# Altium PCB PCB1.PcbDoc
Units mm, origin at the board's own origin, x right, y up, seen from the top; angles counter-clockwise.
Board outline 100 x 70 mm, 4 copper layers (Top Layer, Internal Plane 1, Internal Plane 2, Bottom Layer), stack 0.462 mm thick; 44 components, 53 nets, 204 pads, 0 vias.
Unrouted connection lines stored in the file: 2.
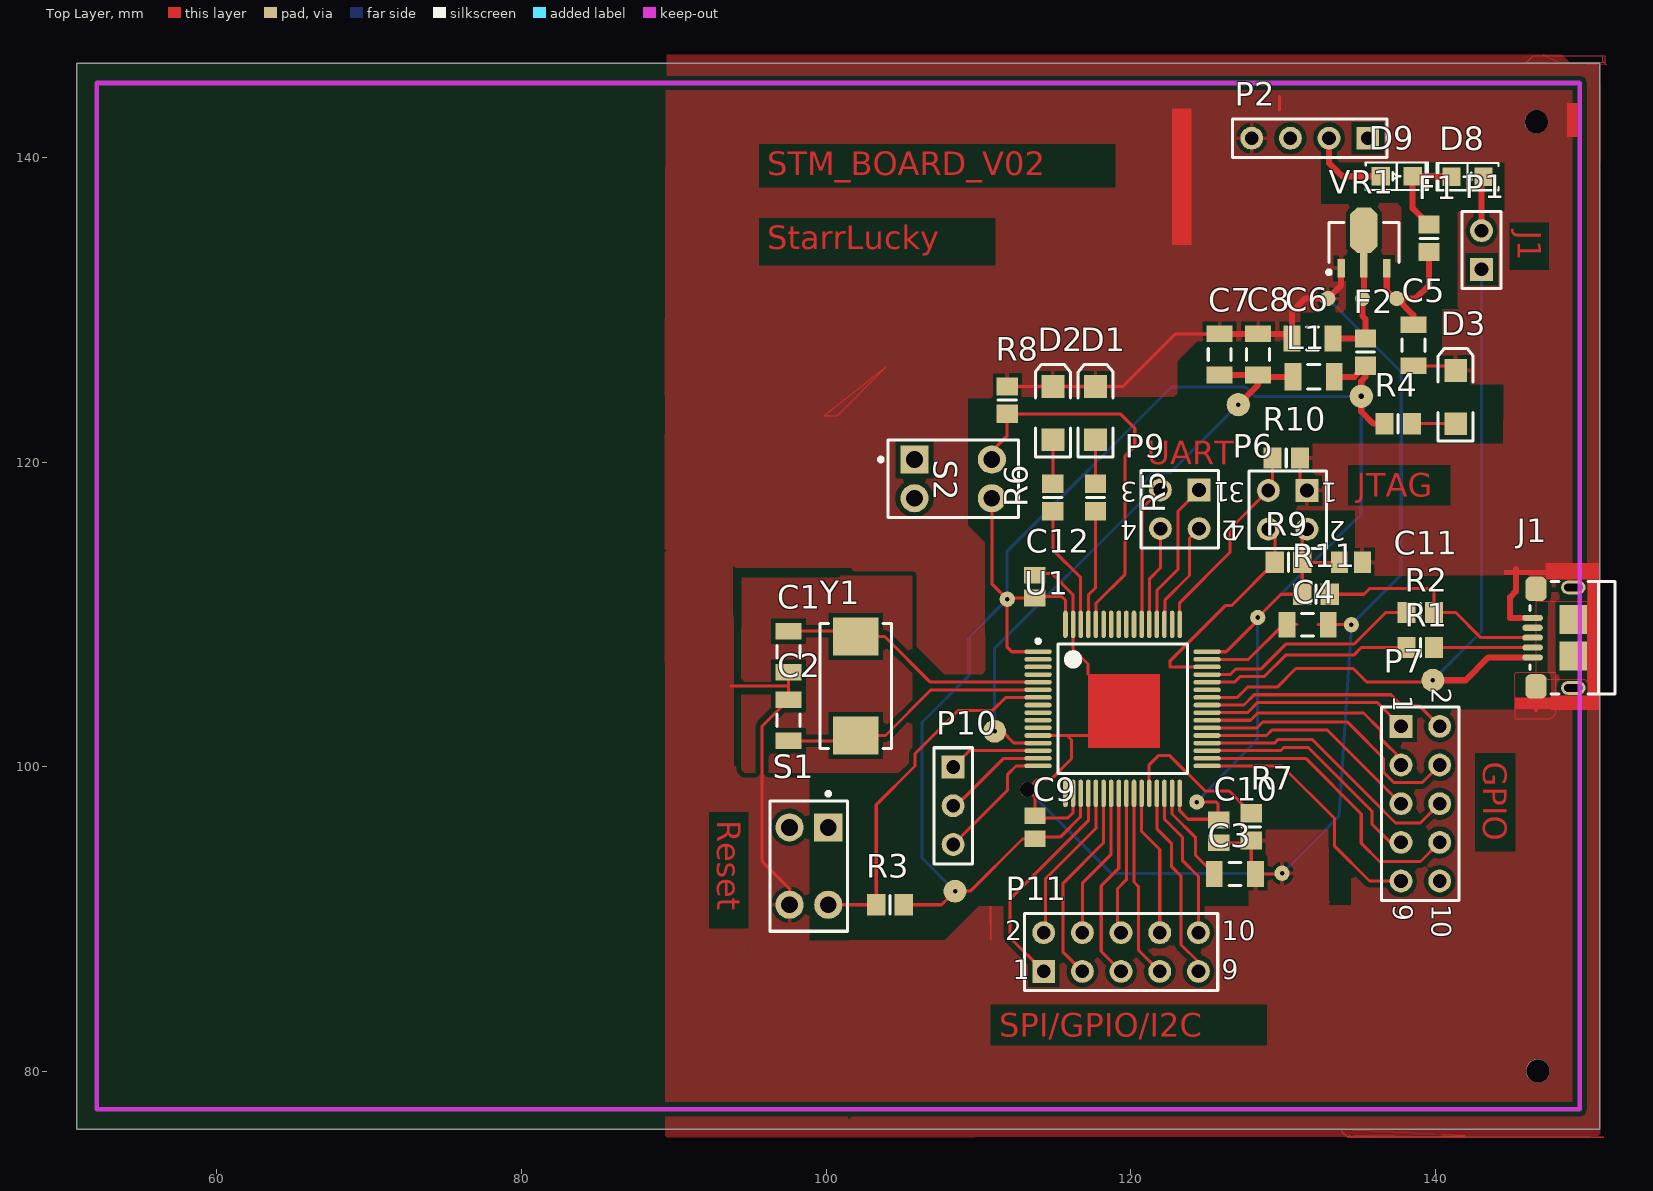
[diagram p0: Top Layer view]
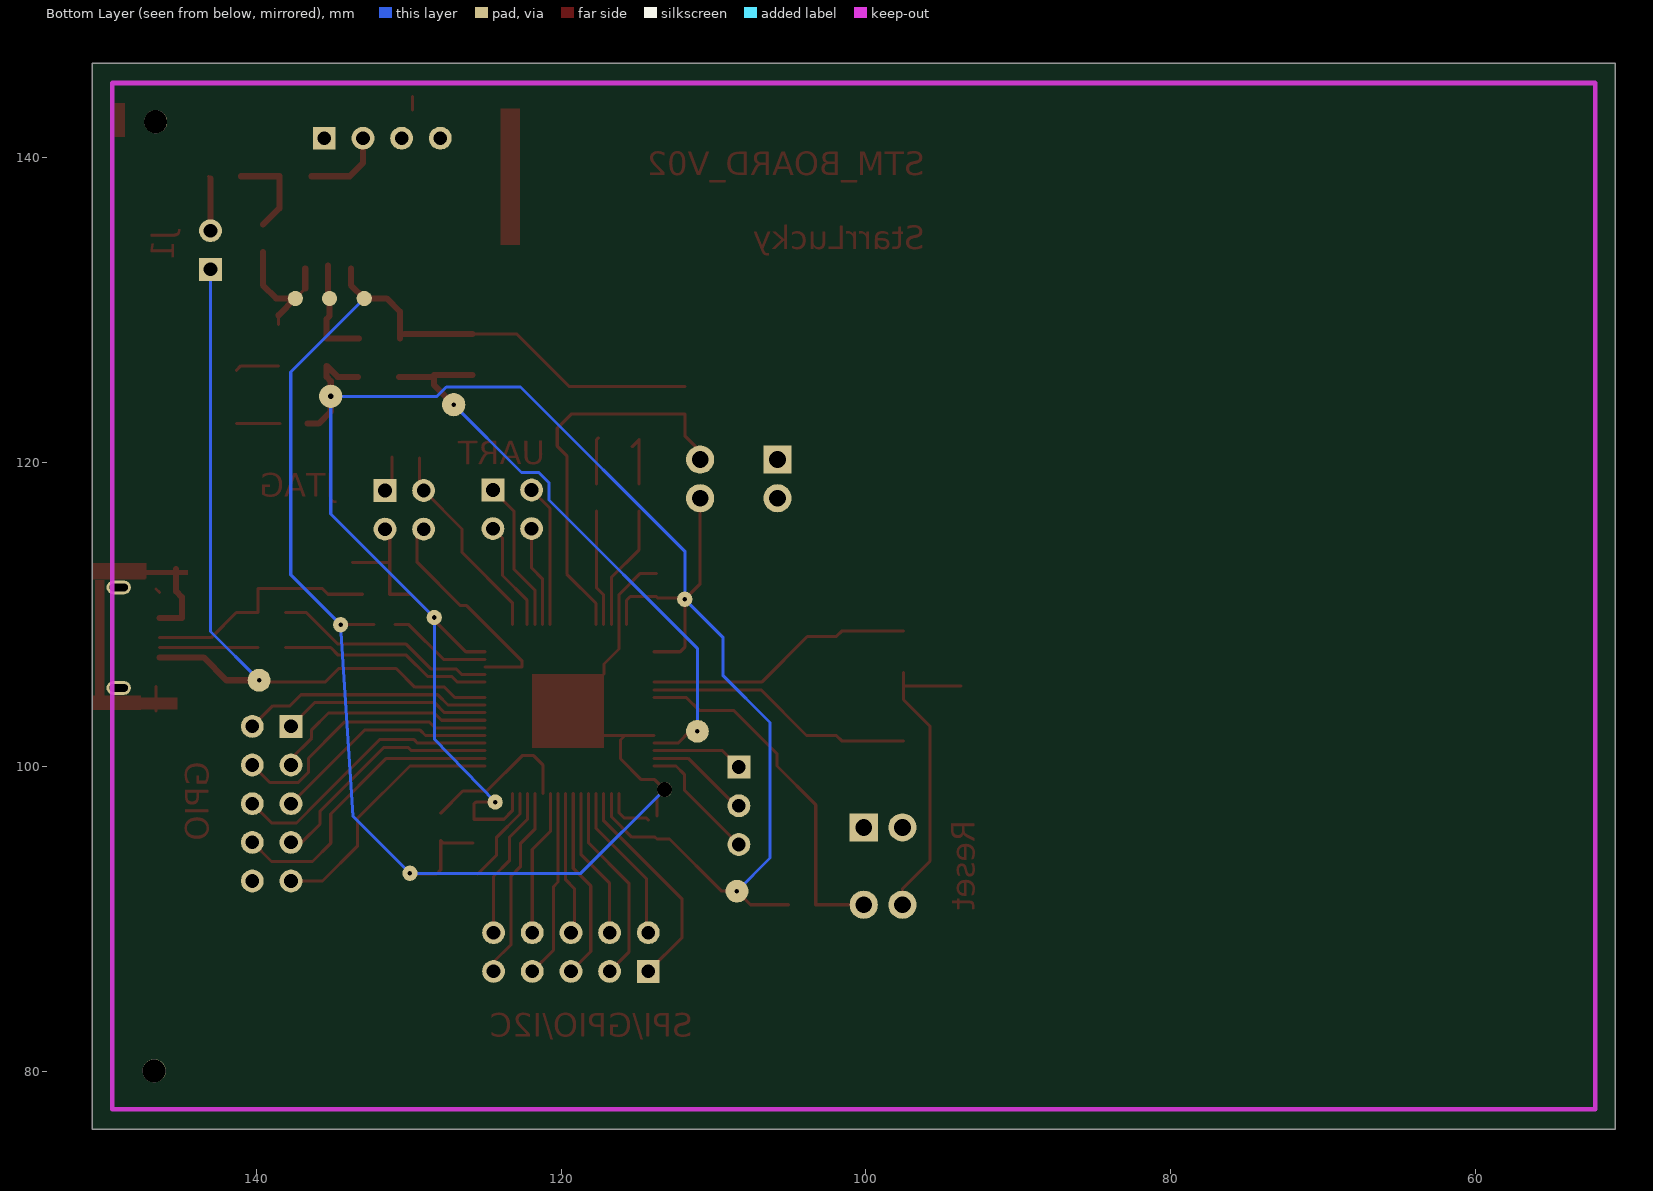
[diagram p1: Bottom Layer view, seen from below]
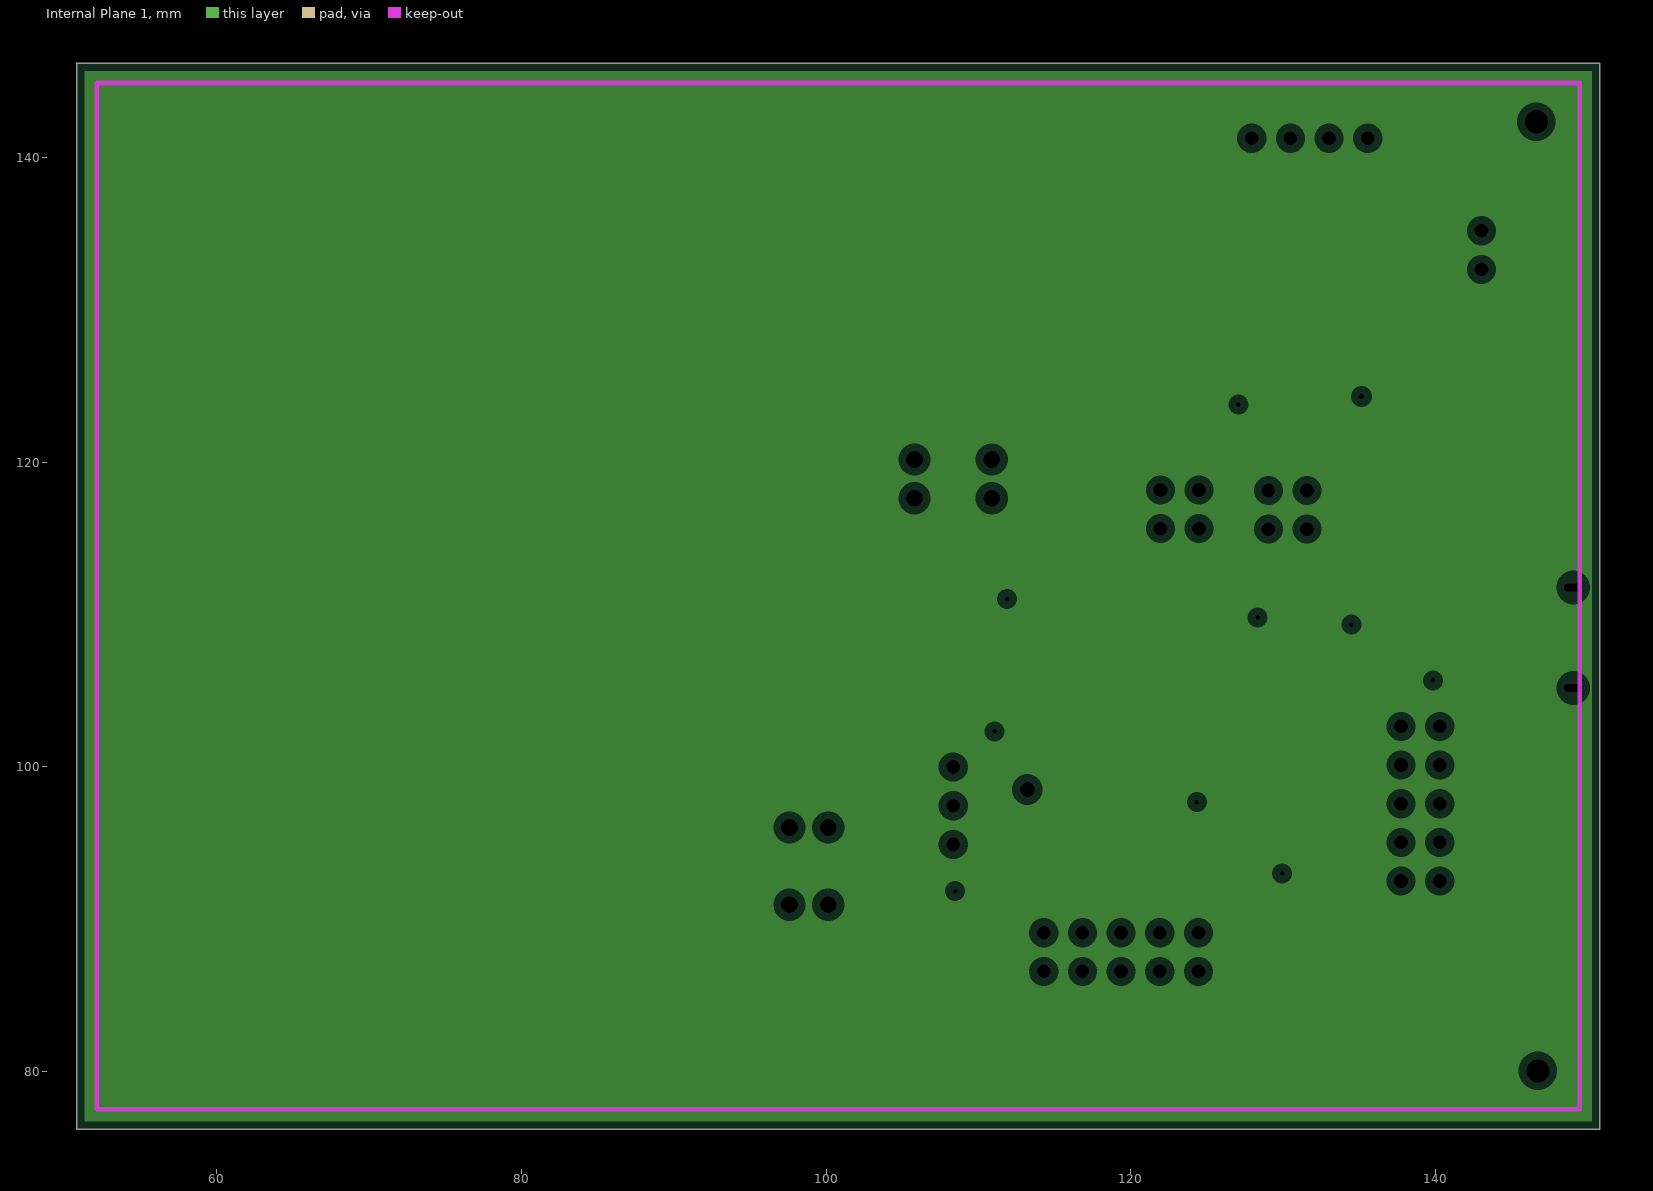
[diagram p2: Internal Plane 1, clearances drawn from the general rule]
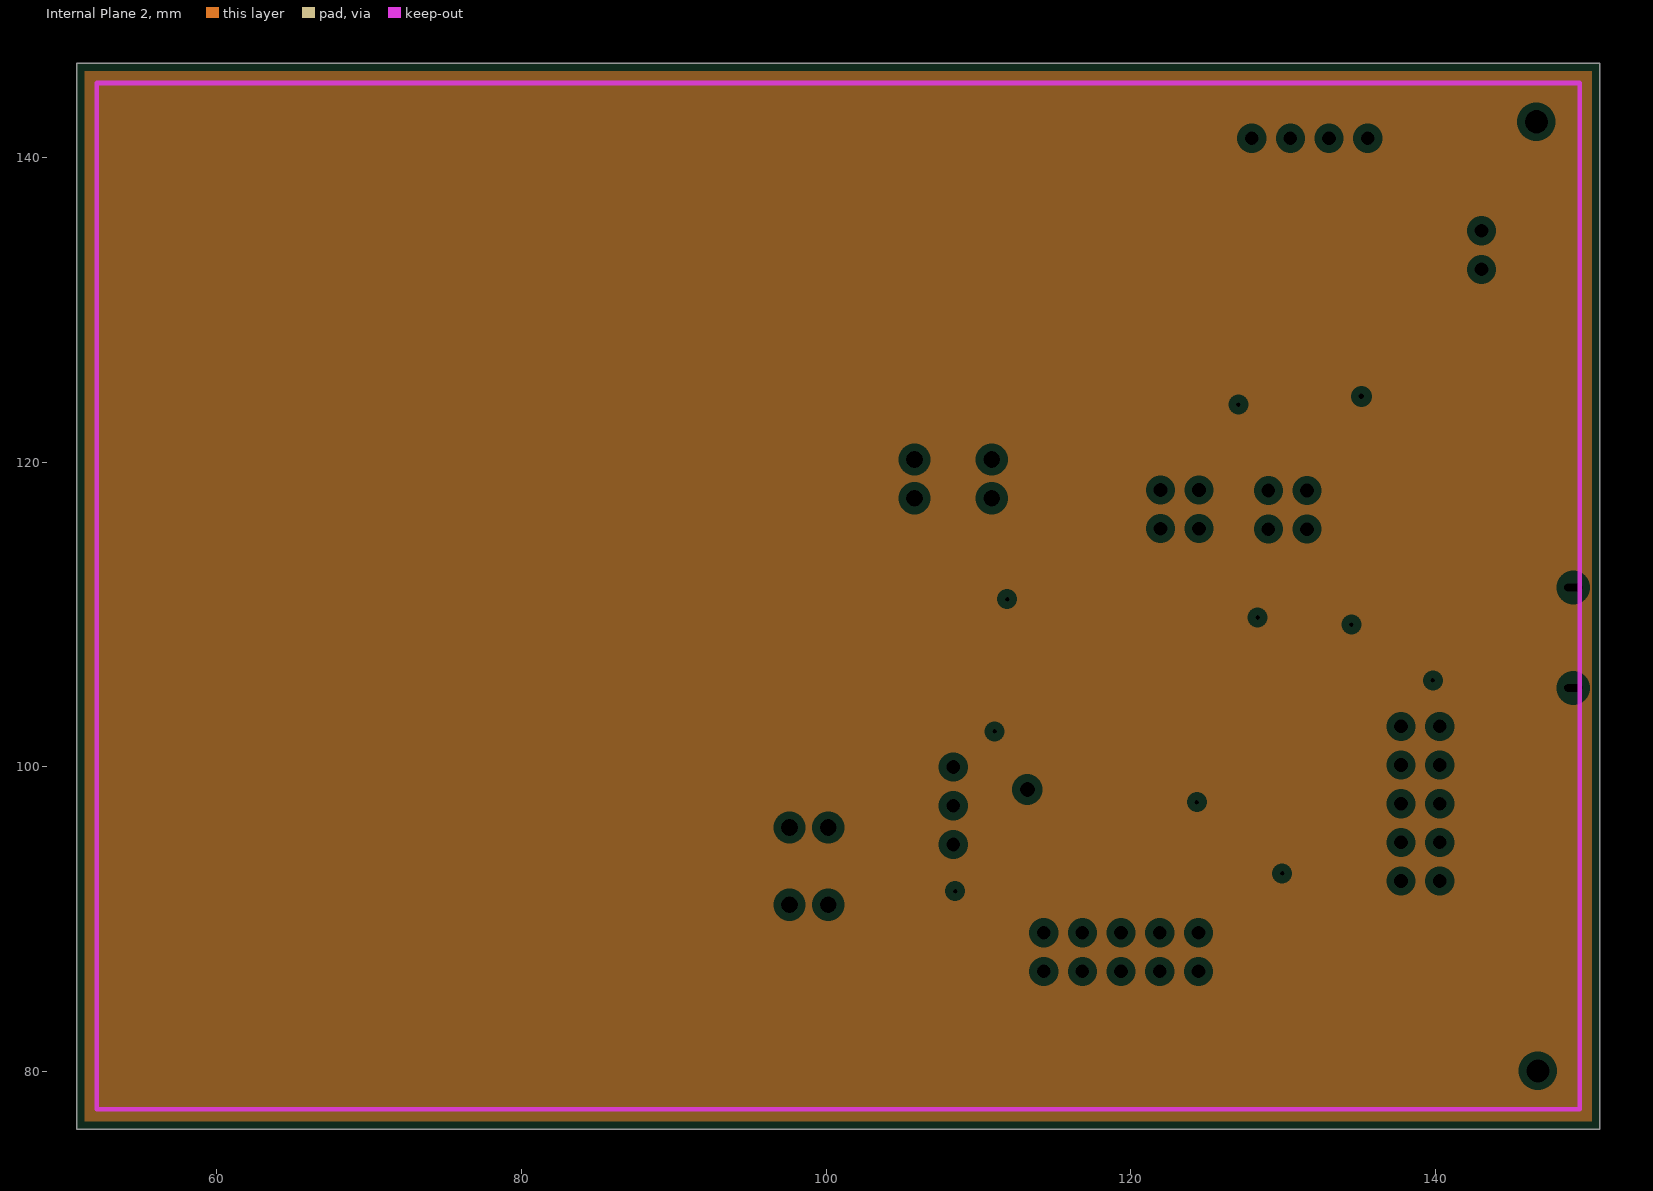
[diagram p3: Internal Plane 2, clearances drawn from the general rule]

## Layer stack, top to bottom
Top Solder: solder mask 0.0102, Solder Resist, Dk 3.5
Top Layer: signal copper 0.0356
Internal Plane 1: plane copper 0.0356
Internal Plane 2: plane copper 0.0356
Dielectric 1: dielectric 0.32, FR-4, Dk 4.8
Bottom Layer: signal copper 0.0356
Bottom Solder: solder mask 0.0102, Solder Resist, Dk 3.5

## Board outline
50.8,76.2 150.8,76.2 150.8,146.2 50.8,146.2

## Design rules (kind name [scope] priority, off if disabled: settings)
Clearance [All] p1: gap=0.3 ignorepadtopadclearanceinfootprint=FALSE
PlaneClearance [All] p1: clearance=0.508
PlaneConnect [All] p1: planeconnectstyle=Relief reliefexpansion=0.508 reliefentries=4 reliefconductorwidth=0.254 reliefairgap=0.254
PolygonConnect [All] p1: connectstyle=Relief reliefconductorwidth=0.254 reliefentries=4 polygonreliefangle="90 Angle" airgapwidth=0.254
RoutingVias [All] p1: holewidth=0.6 width=1 viastyle="Through Hole" minholewidth=0.711 minwidth=1.27 maxholewidth=0.711 maxwidth=1.27
SolderMaskExpansion [All] p1: expansion=0.102
Width [All] p1: maxlimit=0.2 minlimit=0.2 preferedwidth=0.2
28 further rules are at their usual default settings.

## Components (designator, comment, footprint, x,y, rotation, side; value= is the part's Value field where it differs from the comment)
C1 "Cap Semi" C1206 97.536,107.55 r270 top value=18pF
C2 "Cap Semi" C1206 97.536,103.05 r90 top value=18pF
C3 "Cap Semi" C1206 126.85,92.95 r0 top value=0.2uF
C4 "Cap Semi" C1206 131.625,109.325 r0 top value=0.2uF
C5 "" C1206 138.575,127.675 r90 top value=10uF
C6 "Cap Semi" C1206 131.95,128.125 r0 top value=10uF
C7 "Cap Semi" C1206 125.85,127.075 r270 top value=10uF
C8 "Cap Semi" C1206 128.375,127.075 r270 top value=1uF
C9 "Cap Semi" C0805 113.725,96.025 r90 top value=0.1uF
C10 "Cap Semi" C0805 125.8,95.75 r270 top value=0.1uF
C11 "Cap Semi" C0805 134.475,113.425 r0 top value=0.1uF
C12 "Cap Semi" C0805 113.7,111.825 r90 top value=0.1uF
D1 "LED2" 3.2X1.6X1.1 117.7,123.225 r90 top
D2 "LED3" 3.2X1.6X1.1 114.895,123.225 r90 top
D3 "PWR" 3.2X1.6X1.1 141.35,124.275 r90 top
D8 "Diode 1N4002" "LED 0805/2012" 142.125,138.75 r180 top
D9 "Diode 1N4002" "LED 0805/2012" 137.475,138.775 r0 top
F1 "Res3" 6-0805_N 139.6,134.7 r90 top value=0
F2 "Res3" 6-0805_N 135.425,127.225 r90 top value=0
J1 "USB Micro" "FCI USB 10118193-0001LF" 149.025,108.475 r270 top
L1 "Inductor" INDC3216 132.025,125.6 r180 top value=10mH
P1 "Header 2" HDR1X2 143.05,132.66 r90 top
P2 "PWR" HDR1X4 135.575,141.275 r180 top
P6 "SWD" HDR2X2 131.59,118.14 r180 top
P7 "GPIO" HDR2X5 137.76,102.65 r270 top
P9 "UART" HDR2X2 124.5,118.175 r180 top
P10 "ADC" HDR1X3 108.35,99.975 r270 top
P11 "SPI_I2C_TIM_GPIO" HDR2X5 114.295,86.56 r0 top
R1 "Res3" 6-0805_N 139.025,107.825 r0 top value=22
R2 "Res3" 6-0805_N 139.025,110.125 r0 top value=22
R3 "Res3" 6-0805_N 104.2,90.935 r0 top value=10K
R4 "Res3" 6-0805_N 137.575,122.525 r180 top value=330
R5 "" 6-0805_N 117.7,117.675 r270 top value=330
R6 "Res3" 6-0805_N 114.895,117.675 r270 top value=330
R7 "Res3" 6-0805_N 127.925,96.05 r90 top value=10K
R8 "Res3" 6-0805_N 111.9,124.075 r270 top value=10K
R9 "Res3" 6-0805_N 130.375,113.425 r0 top value=10K
R10 "Res3" 6-0805_N 130.225,120.275 r180 top value=10K
R11 "Res3" 6-0805_N 132.175,111.325 r180 top value=1.5k
S1 "SW-DPST" DPST-4 98.875,93.475 r270 top
S2 "SW-DPST" DPST-4 108.35,118.9 r0 top
U1 "STM32F405RGT6" STM-LQFP64_N 119.475,103.8 r0 top
VR1 "Volt Reg 3.3V" SOT89L 135.325,134.425 r90 top
Y1 "Value" "NDK NX8045GB" 101.95,105.3 r90 top

## Footprints (in the part's own frame and the unit in brackets; to place one, negate y for a bottom-side part, rotate by r counter-clockwise, add the part's x,y. Pads: shape width x height; smd on the part's side, far side on the other; paste and mask are expansions set on the pad)
3.2X1.6X1.1 [mm] "SMT LED; 2 Flat Leads"
  rect 1.5x1.5 smd: 1(-1.75,0) 2(1.75,0)
  silkscreen extent -2.9,-1.15 3.2,1.15
6-0805_N [mm] "Chip Resistor, Body 2.0x1.2mm, IPC Medium Density"
  rect 1.2x1.4 smd: 1(-0.9,0) 2(0.9,0)
  silkscreen extent 0,-0.6 0,0.6, body extent -1.07,-0.7 1.07,0.7, height 0.7
C0805 [mm] "Chip Capacitor, Body 2.0x1.3mm, IPC High Density"
  rect 1.1x1.4 smd: 1(-0.75,0) 2(0.75,0)
  body extent -1.1,-0.72 1.1,0.72, height 1.4
C1206 [mm] "Chip Capacitor, Body 3.2x1.6mm, IPC High Density"
  rect 1.1x1.7 smd: 1(-1.35,0) 2(1.35,0)
  silkscreen extent -0.4,-0.75 0.4,0.75, body extent -1.7,-0.9 1.7,0.9, height 1.3
DPST-4 [mm] "Switch; 4 Leads"
  rect 1.85x1.85 hole 1.1: 1(-2.54,1.27)
  round 1.85 hole 1.1: 2(-2.54,-1.27) 3(2.54,-1.27) 4(2.54,1.27)
  silkscreen extent -4.88,-2.54 4.28,2.54
"FCI USB 10118193-0001LF" [mm] "USB 2.0 Type B Micro"
  oval 0.4x1.35 smd: 1(1.3,-2.625) 2(0.65,-2.625) 3(0,-2.625) 4(-0.65,-2.625) 5(-1.3,-2.625)
  oval 0.9x1.6 hole 0.5 slot 1.2 at 90 deg: S(-3.3,0.05) S(3.3,0.05)
  rrect50% 1.6x1.4 smd: S(-3.2,-2.4) S(3.2,-2.4)
  rect 1.9x1.8 smd: S(-1.2,0.05) S(1.2,0.05)
  silkscreen extent -3.7,-2.8 3.7,2.8, body extent -3.93,-2.9 3.93,2.76, height 2.78
HDR1X2 [mm] "Connector; Header; 2 Position"
  rect 1.5x1.5 hole 0.9: 1(0,0)
  round 1.5 hole 0.9: 2(2.54,0)
  silkscreen extent -1.27,-1.27 3.81,1.27
HDR1X3 [mm] "Connector; Header; 3 Position"
  rect 1.5x1.5 hole 0.9: 1(0,0)
  round 1.5 hole 0.9: 2(2.54,0) 3(5.08,0)
  silkscreen extent -1.27,-1.27 6.35,1.27
HDR1X4 [mm] "Connector; Header; 4 Position"
  rect 1.5x1.5 hole 0.9: 1(0,0)
  round 1.5 hole 0.9: 2(2.54,0) 3(5.08,0) 4(7.62,0)
  silkscreen extent -1.27,-1.27 8.89,1.27
HDR2X2 [mm] "Connector; Header; 2x2 Position"
  rect 1.5x1.5 hole 0.9: 1(0,0)
  round 1.5 hole 0.9: 2(0,2.54) 3(2.54,0) 4(2.54,2.54)
  silkscreen extent -1.27,-1.27 3.81,3.81
HDR2X5 [mm] "Connector; Header; 5x2 Position"
  rect 1.5x1.5 hole 0.9: 1(0,0)
  round 1.5 hole 0.9: 2(0,2.54) 3(2.54,0) 4(2.54,2.54) 5(5.08,0) 6(5.08,2.54) 7(7.62,0) 8(7.62,2.54) 9(10.16,0) 10(10.16,2.54)
  silkscreen extent -1.27,-1.27 11.43,3.81
INDC3216 [mm] "Chip Inductor, Body 3.2x1.6mm, IPC High Density"
  rect 1.1x1.8 smd: 1(-1.35,0) 2(1.35,0)
  silkscreen extent -0.4,-0.8 0.4,0.8, body extent -1.7,-0.9 1.7,0.9, height 0.55
"LED 0805/2012" [mm] "Chip Diode, 2-Leads, Body 2.00x1.25mm, IPC Medium Density"
  rect 1.2x1.2 smd: 1(-1.05,0) 2(1.05,0)
  silkscreen extent -2.03,-0.9 2.03,0.9, body extent -1,-0.62 1,0.63, height 0.9
"NDK NX8045GB" [mm] "Crystal, 2-Leads, Body 4.50x8.00mm, Pitch 6.50mm, IPC Medium Density"
  rect 2.5x3 smd: 1(-3.25,0) 2(3.25,0)
  silkscreen extent -4.1,-2.35 4.1,2.35, body extent -4,-2.25 4,2.25, height 1.8
SOT89L [mm] "SOT89, 3-Leads, Body 4.5x2.4 mm, Pitch 1.5mm, Lead Span 4.1mm, IPC High Density"
  rect 1.2x0.5 smd: 1(-1.7,1.5) 3(-1.7,-1.5)
  rect 1.6x0.5 smd: 2(-1.5,0)
  oct 3x1.8 smd: 2(0.8,0)
  silkscreen extent -2.07,-2.3 1.3,2.42, body extent -1.3,-2.3 1.3,2.3, height 1.6
STM-LQFP64_N [mm] "Thin QFP, 64-Leads, Body 10x10mm, Pitch 0.5mm, IPC Medium Density"
  oval 1.8x0.3 smd: 1(-5.55,3.75) 2(-5.55,3.25) 3(-5.55,2.75) 4(-5.55,2.25) 5(-5.55,1.75) 6(-5.55,1.25) 7(-5.55,0.75) 8(-5.55,0.25) 9(-5.55,-0.25) 10(-5.55,-0.75) 11(-5.55,-1.25) 12(-5.55,-1.75) 13(-5.55,-2.25) 14(-5.55,-2.75) 15(-5.55,-3.25) 16(-5.55,-3.75) 33(5.55,-3.75) 34(5.55,-3.25) 35(5.55,-2.75) 36(5.55,-2.25) 37(5.55,-1.75) 38(5.55,-1.25) 39(5.55,-0.75) 40(5.55,-0.25) 41(5.55,0.25) 42(5.55,0.75) 43(5.55,1.25) 44(5.55,1.75) 45(5.55,2.25) 46(5.55,2.75) 47(5.55,3.25) 48(5.55,3.75)
  oval 0.3x1.8 smd: 17(-3.75,-5.55) 18(-3.25,-5.55) 19(-2.75,-5.55) 20(-2.25,-5.55) 21(-1.75,-5.55) 22(-1.25,-5.55) 23(-0.75,-5.55) 24(-0.25,-5.55) 25(0.25,-5.55) 26(0.75,-5.55) 27(1.25,-5.55) 28(1.75,-5.55) 29(2.25,-5.55) 30(2.75,-5.55) 31(3.25,-5.55) 32(3.75,-5.55) 49(3.75,5.55) 50(3.25,5.55) 51(2.75,5.55) 52(2.25,5.55) 53(1.75,5.55) 54(1.25,5.55) 55(0.75,5.55) 56(0.25,5.55) 57(-0.25,5.55) 58(-0.75,5.55) 59(-1.25,5.55) 60(-1.75,5.55) 61(-2.25,5.55) 62(-2.75,5.55) 63(-3.25,5.55) 64(-3.75,5.55)
  silkscreen extent -5.67,-4.25 4.25,4.57, body extent -5,-5 5,5, height 1.6

## Part data
C1 C2 C3 C4 C6 C7 C8 C9 C10 C11 C12: "Capacitor (Semiconductor SIM Model)", LatestRevisionDate=29-May-2009, LatestRevisionNote="IPC-7351 Footprint Added.", PackageDescription="Chip Capacitor", PackageReference=C1206, Published=8-Jun-2000, Publisher="Altium Limited"
C5: library part "Cap Semi", "Capacitor (Semiconductor SIM Model)", LatestRevisionDate=29-May-2009, LatestRevisionNote="IPC-7351 Footprint Added.", PackageDescription="Chip Capacitor", PackageReference=C1206, Published=8-Jun-2000, Publisher="Altium Limited"
D1: "Typical RED, GREEN, YELLOW, AMBER GaAs LED", LatestRevisionDate=17-Jul-2002, LatestRevisionNote="Re-released for DXP Platform.", PackageDescription="SM LED; 2 Flat Leads", PackageReference=3.2X1.6X1.1, PackageVersion=Feb-2002, Published=8-Jun-2000, Publisher="Altium Limited"
D2 D3: library part LED2, "Typical RED, GREEN, YELLOW, AMBER GaAs LED", LatestRevisionDate=17-Jul-2002, LatestRevisionNote="Re-released for DXP Platform.", PackageDescription="SM LED; 2 Flat Leads", PackageReference=3.2X1.6X1.1, PackageVersion=Feb-2002, Published=8-Jun-2000, Publisher="Altium Limited"
D8 D9: "1 Amp General Purpose Rectifier", Code_JEDEC=DO-204-AL, ComponentLink1Description="Manufacturer Link", ComponentLink1URL=http://www.fairchildsemi.com/, ComponentLink2Description=Datasheet, ComponentLink2URL=http://www.fairchildsemi.com/ds/1N%2F1N4001.pdf, DatasheetVersion=1998, LatestRevisionDate=17-Jul-2002, LatestRevisionNote="Re-released for DXP Platform.", PackageDescription="Diode, Axial; Body 5.2 x 2.7 mm (LxDia. max), Lead Dia. 0.86 mm (max)", PackageReference=DO-41, PackageVersion=Aug-1999, Published=8-Jun-2000, Publisher="Altium Limited"
F1 F2 R1 R2 R3 R4 R6 R7 R8 R9 R10 R11: "Resistor", LatestRevisionDate=29-May-2009, LatestRevisionNote="IPC-7351 Footprint Added.", PackageDescription="Chip Resistor", PackageReference=J1-0603, Published=8-Jun-2000, Publisher="Altium Limited"
J1: library part "USB 2.0 Type B Micro"
P1: "Header, 2-Pin", LatestRevisionDate=17-Jul-2002, LatestRevisionNote="Re-released for DXP Platform.", Publisher="Altium Limited"
P2: library part "Header 4", "Header, 4-Pin", LatestRevisionDate=17-Jul-2002, LatestRevisionNote="Re-released for DXP Platform.", Publisher="Altium Limited"
P6 P9: library part "Header 2X2", "Header, 2-Pin, Dual row", LatestRevisionDate=17-Jul-2002, LatestRevisionNote="Re-released for DXP Platform.", Publisher="Altium Limited"
P7 P11: library part "Header 5X2", "Header, 5-Pin, Dual row", LatestRevisionDate=17-Jul-2002, LatestRevisionNote="Re-released for DXP Platform.", Publisher="Altium Limited"
P10: library part "Header 3", "Header, 3-Pin", LatestRevisionDate=17-Jul-2002, LatestRevisionNote="Re-released for DXP Platform.", Publisher="Altium Limited"
R5: library part Res3, "Resistor", LatestRevisionDate=29-May-2009, LatestRevisionNote="IPC-7351 Footprint Added.", PackageDescription="Chip Resistor", PackageReference=J1-0603, Published=8-Jun-2000, Publisher="Altium Limited"
S1 S2: "Double-Pole, Single-Throw Switch", LatestRevisionDate=17-Jul-2002, LatestRevisionNote="Re-released for DXP Platform.", PackageDescription="Switch; 4 Leads", PackageReference=DPST-4, Published=24-Mar-1999, Publisher="Altium Limited"
U1: "ARM Cortex-M4 32-bit MCU+FPU, 210 DMIPS, 1024 kB Flash, 192 kB Internal RAM, 51 I/Os, 64-pin LQFP, -40 to 85 degC, Tray", I/Os (High Current)=51, Manufacturer=STMicroelectronics, Operating Frequency(F) (Processor speed) (MHz)=168, Supplier Part Number 1=497-11767-ND, Supply Voltage(Vcc) max (V)=3.6, Supply Voltage(Vcc) min (V)=1.8, ComponentLink1Description="Manufacturer URL", ComponentLink1URL=http://www.st.com/web/en/home.html, ComponentLink2Description=Datasheet, ComponentLink2URL=http://www.st.com/st-web-ui/static/active/en/resource/technical/document/datasheet/DM00037051.pdf, ComponentLink3Description="Package Specification", ComponentLink3URL=http://www.st.com/st-web-ui/static/active/en/resource/technical/document/datasheet/DM00037051.pdf, Core="ARM Cortex-M4", D/A Converter=2x12-bit, DatasheetVersion="Rev. 4", FLASH Size (Prog) (kB)=1024, Internal RAM Size (kB)=192, Mounting Technology="Surface Mount", PackageDescription="64-Pin Low Profile Quad Flat Package, 10 x 10 mm Body, 0.5 mm Pitch", PackageReference=LQFP64, PackageVersion="Rev. 4, 06/2013", Packing=Tray, PartNumber=STM32F405RGT6, Supplier 1=Digi-Key, Supplier 2=Farnell, Supplier 3=Newark, Supplier 4=Mouser, Supplier Part Number 2=2064363, Supplier Part Number 3=73T2329, Supplier Part Number 4=511-STM32F405RGT6
VR1: library part "Volt Reg", "Voltage Regulator", LatestRevisionDate=29-May-2009, LatestRevisionNote="IPC-7351 Footprint Added.", PackageDescription="3-Pin Transistor Outline Package 2.54 mm Pitch, 15.1 mm Lead Span", PackageReference=D2PAK, Published=24-Mar-1999, Publisher="Altium Limited"
Y1: library part "Abracon Crystal ABLS", "SMT Crystal"
L1: Code_IEC=1005, Code_JEITA=0402, LatestRevisionDate=29-May-2009, LatestRevisionNote="IPC-7351 Footprint Added.", PackageDescription="Chip Inductor", PackageReference=0402-A, Published=8-Jun-2000, Publisher="Altium Limited"

## Free pads (board coordinates)
  round 1 hole 0.3: 3.3(128.35,109.8) 7(129.95,93) 15(111.9,111) 18(124.35,97.675) G(134.5,109.325)
  round 1.5 hole 0.3: 5V(139.85,105.675) 8(108.475,91.825) 9(111.075,102.325)
  round 1 all layers, no hole: 6(132.95,130.75) 11(137.475,130.75) 12(135.225,130.75)
  round 1 hole 1: 10(113.225,98.5)
  round 1.524 hole 0.3: 13(127.075,123.775)
  round 1.524 hole 0.362: 14(135.15,124.325)
  round 1.524 hole 1.524: 16(146.65,142.35) 17(146.75,80.025)

## Nets (pads, with @x,y where several pads share a name; then routed paths per layer and width w, separated by ;. In a path a pad name is that pad's centre, name@x,y a point inside that pad or via, vN(x,y) a via of type N, cw(c..) or ccw(c..) an arc to the next point about the centre after c; other vN are vias at no path point)
+3.3V: C9.1 C10.1 C11.1 C12.1 F2.1 L1.1 P6.2 pad.3.3 pad.8 pad.14 pad.15 pad.18 R3.2 R4.2 R9.2 R11.2 S2.3 U1.1 U1.19 U1.32 U1.48 U1.64 | length 146.4
  Top Layer w0.2: R3.2 107.585,90.935 pad.8 109.475,91.825 112.9,95.25 113.725,95.25 113.85,95.375 115.375,95.375 116.725,96.725 U1.19 ; S2.3 110.89,112.01 pad.15 111.9,107.85 112.2,107.55 U1.1 ; pad.15@112,110.9 112.175,111.075 C12.1 ; C12.1@113.75,111.175 115.475,111.175 115.725,110.925 U1.64 ; U1.32 123.225,97.1 123.775,96.55 125.75,96.55 125.75,97.55 125.625,97.675 pad.18 ; U1.48 126.275,107.55 128.35,109.625 pad.3.3 129.875,111.325 R11.2 R9.2 ; P6.2 131.275,115.285 R9.2 ; C11.1 R9.2
  Top Layer w0.4: L1.1 134.7,125.6 F2.1 135.425,125.6 135.15,125.325 pad.14 135.15,123.325 135.95,122.525 R4.2
  Bottom Layer w0.2: pad.8 106.3,94 106.3,102.9 109.4,106 109.4,108.5 pad.15 111.9,114.15 122.687,124.937 127.556,124.937 128.168,124.325 pad.14 135.15,116.6 pad.3.3 128.35,101.825 pad.18
+5V: D8.2 D9.2 F1.2 | length 6.2
  Top Layer w0.2: D8.2@141.05,138.775 D8.2
  Top Layer w0.4: F1.2 138.525,136.675 D9.2 D8.2@141.05,138.775
GND: C1.2 C2.2 C3.2 C4.2 C5.1 C6.1 C7.1 C8.1 C9.2 C10.2 C11.2 C12.2 D1.2 D2.2 D3.2 J1.5 J1.S P2.4 P6.1 pad.6 pad.7 pad.10 pad.17 pad.G R7.1 R8.1 R10.1 S1.3 U1.12 U1.18 U1.63 VR1.1 | length 153.5
  Top Layer w0.2: 93.775,105.3 97.536,105.3 ; C1.2 97.536,105.3 ; S1.3 97.605,91.995 95.8,93.8 95.8,102.664 C2.2 97.536,105.3 ; R8.1 D2.2 D1.2 119.5,124.975 122.95,128.425 C7.1 ; C9.2 113.725,98 pad.10 113.875,99.15 114.75,99.15 116.125,100.525 116.125,101.75 115.825,102.05 ; C12.2@113.75,112.675 114.85,112.675 116.225,111.3 U1.63 116.225,107.725 117.2,106.75 117.2,106.075 ; U1.12 115.825,102.05 ; C9.2@114.3,96.5 114.425,96.625 115.875,96.625 116.225,96.975 U1.18 ; 117.45,102.05 115.825,102.05 ; C10.2 127.775,95 R7.1 127.925,93.225 C3.2 129.9,92.95 pad.7 ; 129.775,143.129 129.775,144.025 ; C6.1@130.3,128.425 C6.1 ; R10.1@131.125,120.341 R10.1 131.125,118.605 P6.1 ; 132.325,109.325 pad.G ; C5.1 141.05,126.325 D3.2 ; J1.S@146.4,111.45 J1.S@146.625,111.675 ; 146.625,103.675 J1.S@146.625,105.275
  Top Layer w0.4: C7.1 C8.1 C6.1@130.3,128.425 ; C6.1 130.6,129.875 131.475,130.75 pad.6 133.825,131.625 VR1.1 ; 145.3,112.975 145.3,111.513 144.925,111.138 144.925,109.775 J1.5
  Bottom Layer w0.2: pad.10 118.725,93 pad.7 133.675,96.725 pad.G 137.775,112.6 137.775,125.925 pad.6
NetC1_1: C1.1 U1.5 Y1.2 | length 17.8
  Top Layer w0.2: C1.1 101.6,108.9 Y1.2 103.85,108.55 106.85,105.55 U1.5
NetC2_1: C2.1 U1.6 Y1.1 | length 17.8
  Top Layer w0.2: C2.1 101.6,101.7 Y1.1 103.9,102.05 106.9,105.05 U1.6
NetC3_1: C3.1 U1.31 | length 6.4
  Top Layer w0.2: U1.31 122.725,96.893 124.275,95.343 124.275,94.175 C3.1
NetC4_1: C4.1 U1.47 | length 6.8
  Top Layer w0.2: U1.47 127.75,107.05 130.025,109.325 130.925,109.325
NetC5_2: C5.2 F1.1 pad.11 VR1.3 | length 9.1
  Top Layer w0.2: 136.825,131.4 pad.11 ; C5.2 138.575,129.65
  Top Layer w0.4: 136.825,131.4 VR1.3 ; 138.575,129.65 pad.11 138.725,130.75 139.6,131.625 F1.1
NetC6_2: C6.2 F2.2 pad.12 VR1.2 | length 7
  Top Layer w0.2: pad.12 pad.12@135.325,130.85
  Top Layer w0.4: C6.2 F2.2 135.425,129.4 135.225,129.6 pad.12 ; pad.12@135.325,130.85 VR1.2@135.325,132.925
NetC7_2: C7.2 C8.2 L1.2 pad.9 pad.13 U1.13 | length 39.3
  Top Layer w0.2: pad.9 111.575,102.325 112.35,101.55 U1.13 ; C8.2 C8.2@128.5,125.6
  Top Layer w0.4: C7.2 C8.2 128.375,125.075 pad.13 ; C8.2@128.5,125.6 L1.2
  Bottom Layer w0.2: pad.9 111.075,107.775 120.81,117.51 120.81,118.651 121.484,119.325 122.625,119.325 pad.13
NetD1_1: D1.1 R5.1 | length 3.1
  Top Layer w0.2: D1.1@117.575,121.6 D1.1 R5.1
NetD2_1: D2.1 R6.1 | length 3.5
  Top Layer w0.2: R6.1 D2.1 D2.1@115.35,121.02
NetD3_1: D3.1 R4.1 | length 2.9
  Top Layer w0.2: R4.1 D3.1
NetD8_1: D8.1 P1.2 | length 3.6
  Top Layer w0.2: D8.1@143.05,138.625 D8.1
  Top Layer w0.4: P1.2 D8.1@143.05,138.625
NetD9_1: D9.1 P2.2 | length 5.4
  Top Layer w0.4: P2.2 133.035,139.64 133.9,138.775 D9.1
NetJ1_2: J1.2 R1.2 | length 6.5
  Top Layer w0.2: R1.2 J1.2
NetJ1_3: J1.3 J1.4 R2.2 R11.1 | length 15.7
  Top Layer w0.2: R11.1 135.325,111.325 135.7,111.7 139.925,111.7 R2.2 141.35,110.125 143,108.475 J1.3
NetP6_3: P6.3 R10.2 U1.49 | length 13.5
  Top Layer w0.2: U1.49 123.225,110.775 126.525,114.075 126.525,115.615 P6.3 129.325,118.415 R10.2
NetP6_4: P6.4 R9.1 U1.46 | length 14.8
  Top Layer w0.2: U1.46 122.575,106.55 122.575,106.925 126.225,110.575 126.625,110.575 R9.1 129.475,115.175 P6.4
NetP7_1: P7.1 U1.40 | length 13.7
  Top Layer w0.2: U1.40 127.675,103.55 128.35,104.225 136.185,104.225 P7.1
NetP7_2: P7.2 U1.41 | length 16.4
  Top Layer w0.2: U1.41 127.45,104.05 128.125,104.725 137.1,104.725 137.825,104 138.95,104 P7.2
NetP7_3: P7.3 U1.39 | length 14.9
  Top Layer w0.2: U1.39 127.824,103.05 127.882,103.05 128.357,103.525 135.3,103.525 136.4,102.425 136.4,101.875 137.76,100.515 P7.3
NetP7_4: P7.4 U1.38 | length 18.1
  Top Layer w0.2: U1.38 128.3,102.55 128.7,102.95 134.225,102.95 135.575,101.6 135.575,101.588 136.61,100.553 136.61,99.634 137.284,98.96 139.15,98.96 P7.4
NetP7_5: P7.5 U1.37 | length 14.9
  Top Layer w0.2: U1.37 128.925,102.05 129.275,102.4 132.93,102.4 P7.5
NetP7_6: P7.6 U1.36 | length 18.2
  Top Layer w0.2: U1.36 129.45,101.55 129.675,101.775 131.95,101.775 136.61,97.115 136.61,97.094 137.404,96.3 139.03,96.3 P7.6
NetP7_7: P7.7 U1.35 | length 15.9
  Top Layer w0.2: U1.35 129.85,101.05 130.075,101.275 131.65,101.275 135.85,97.075 135.85,96.225 137.045,95.03 P7.7
NetP7_8: P7.8 U1.34 | length 19.7
  Top Layer w0.2: U1.34 131.5,100.55 135.15,96.9 135.15,94.975 136.35,93.775 139.045,93.775 P7.8
NetP7_9: P7.9 U1.33 | length 16.9
  Top Layer w0.2: U1.33 129.95,100.05 133.4,96.6 133.4,94.775 135.685,92.49 P7.9
NetP9_1: P9.1 U1.52 | length 10
  Top Layer w0.2: U1.52@121.75,109.325 121.75,111.6 123.11,112.96 123.11,116.785 P9.1
NetP9_2: P9.2 U1.51 | length 7.2
  Top Layer w0.2: U1.51@122.25,109.325 122.25,110.925 123.875,112.55 123.875,115.01 P9.2
NetP9_3: P9.3 U1.54 | length 9.4
  Top Layer w0.2: U1.54@120.75,109.325 120.75,116.965 P9.3
NetP9_4: P9.4 U1.53 | length 6.6
  Top Layer w0.2: U1.53@121.25,109.325 121.25,112.35 121.96,113.06 P9.4
NetP10_1: P10.1 U1.14 | length 6
  Top Layer w0.2: P10.1 109.425,101.05 U1.14
NetP10_2: P10.2 U1.15 | length 6.9
  Top Layer w0.2: P10.2 108.56,97.435 111.675,100.55 U1.15
NetP10_3: P10.3 U1.16 | length 8.3
  Top Layer w0.2: P10.3 111.925,98.47 111.925,99.5 112.475,100.05 U1.16
NetP11_1: P11.1 U1.20 | length 14.7
  Top Layer w0.2: P11.1 112.075,88.78 112.075,91.3 117.225,96.45 U1.20
NetP11_2: P11.2 U1.21 | length 10.6
  Top Layer w0.2: P11.2 114.4,89.205 114.4,92.625 117.725,95.95 U1.21
NetP11_3: P11.3 U1.22 | length 13.3
  Top Layer w0.2: P11.3 115.575,87.82 115.575,92.35 118.225,95 U1.22
NetP11_4: P11.4 U1.23 | length 9.9
  Top Layer w0.2: P11.4 116.85,89.115 116.85,92.375 118.725,94.25 U1.23
NetP11_5: P11.5 U1.24 | length 12.7
  Top Layer w0.2: U1.24 119.225,93.325 118.075,92.175 118.075,87.86 P11.5
NetP11_6: P11.6 U1.25 | length 9.5
  Top Layer w0.2: P11.6 119.15,89.325 119.15,92 119.725,92.575 U1.25
NetP11_7: P11.7 U1.26 | length 12.4
  Top Layer w0.2: U1.26 120.225,92.425 120.525,92.125 120.525,87.95 P11.7
NetP11_8: P11.8 U1.27 | length 9.6
  Top Layer w0.2: U1.27 120.725,95.75 121.915,94.56 P11.8
NetP11_9: P11.9 U1.29 | length 12.8
  Top Layer w0.2: U1.29 121.725,95.925 122.7,94.95 122.7,93.425 123.305,92.82 123.305,88.329 124.455,87.179 P11.9
NetP11_10: P11.10 U1.30 | length 10.1
  Top Layer w0.2: U1.30 122.225,96.55 123.425,95.35 123.425,93.825 124.455,92.795 P11.10
NetR1_1: R1.1 U1.44 | length 14
  Top Layer w0.2: U1.44 126.825,105.55 127.2,105.925 128.782,105.925 130.182,107.325 134.657,107.325 135.157,107.825 R1.1
NetR2_1: R2.1 U1.45 | length 14.8
  Top Layer w0.2: U1.45 126.55,106.05 126.925,106.425 128.575,106.425 130.2,108.05 134.675,108.05 136.75,110.125 R2.1
NetR3_1: R3.1 S1.4 U1.7 | length 23.7
  Top Layer w0.2: S1.4 R3.1 103.3,97.5 105.85,100.05 105.85,100.85 108.7,103.7 110.95,103.7 111.8,104.55 U1.7
NetR5_2: R5.2 U1.61 | length 7.6
  Top Layer w0.2: U1.61 117.225,111.275 117.7,111.75 R5.2
NetR6_2: R6.2 U1.62 | length 8.2
  Top Layer w0.2: R6.2 114.895,114.255 116.725,112.425 U1.62
NetR7_2: R7.2 U1.28 | length 10.4
  Top Layer w0.2: U1.28 121.225,100.125 121.825,100.725 122.575,100.725 124.9,98.4 126.475,98.4 R7.2
NetR8_2: R8.2 S2.4 U1.60 | length 26.1
  Top Layer w0.2: S2.4 110.89,120.715 111.9,121.725 R8.2 119.325,123.175 120.275,122.225 120.275,121.05 119.644,120.419 119.644,112.644 117.725,110.725 U1.60
VbusP: J1.1 P1.1 pad.5V U1.42 | length 51.5
  Top Layer w0.2: U1.42 127,104.55 127.675,105.225 129.625,105.225 130.85,106.45 134.625,106.45 135.525,105.55 139.725,105.55 pad.5V
  Top Layer w0.4: pad.5V 142,105.675 143.5,107.175 J1.1
  Bottom Layer w0.2: pad.5V 143.05,108.875 P1.1
pads on no net: P2.1 P2.3 P7.10 S1.1 S1.2 S2.1 S2.2 U1.2 U1.3 U1.4 U1.8 U1.9 U1.10 U1.11 U1.17 U1.43 U1.50 U1.55 U1.56 U1.57 U1.58 U1.59

## Polygon pours and split planes (outlines as drawn)
GND on Top Layer "GND_L01_P154" (solid, pour order 154): 147.075,146.75 147.15,146.675 151.125,146.675 151.125,146.25 151.15,146.225 148.075,146.225
GND on Top Layer "GND_L01_P152" (solid, pour order 152): 146,146.225 146.45,146.675 150.975,146.675 150.975,146.35 151.225,146.1
GND on Top Layer "GND_L01_P150" (solid, pour order 150): 133.875,76.175 133.875,76.025 134.25,75.65 134.35,75.75 141.95,75.75
GND on Top Layer "GND_L01_P148" (solid, pour order 148): 134.5,75.7 150.624,75.7 150.633,75.709 150.325,76.018 150.325,76.5
GND on Top Layer "GND_L01_P146" (solid, pour order 146): 134.5,76.4 150.75,76.4 150.825,76.475 150.85,76.45 150.85,75.7
GND on Top Layer "GND_L01_P144" (solid, pour order 144): 134.275,75.675 134.3,75.65 151.075,75.65
GND on Top Layer "GND_L01_P142" (solid, pour order 142): 89.474,144.413 89.525,144.464 89.525,146.75 148.3,146.75 150.775,144.275
GND on Top Layer "GND_L01_P140" (solid, pour order 140): 99.9,123.05 100.725,123.05 103.95,126.275
GND on Top Layer "GND_L01_P138" (solid, pour order 138): 100.475,123.025 101.85,124.4 108.625,124.4
GND on Top Layer "GND_L01_P136" (solid, pour order 136): 101.2,123.375 101.2,124.75 102.6,123.35 109.1,123.35 109.1,124.225 109.525,124.65
GND on Top Layer "GND_L01_P134" (solid, pour order 134): 109.275,115.875 109.3,115.9 109.3,124.15 101.375,124.15 101.175,124.35 101.05,124.225 101.05,115.825
GND on Top Layer "GND_L01_P132" (solid, pour order 132): 101.611,113.062 93.888,113.062 93.825,113.125 93.875,113.175 93.875,124.225 101.625,124.225
GND on Top Layer "GND_L01_P130" (solid, pour order 130): 89.474,144.413 111.1,144.413 111.1,124.475 110.825,124.2 89.425,124.2
GND on Top Layer "GND_L01_P128" (solid, pour order 128): 89.426,114.107 89.483,114.05 93.875,114.05 93.875,140.425 89.475,144.825
GND on Top Layer "GND_L01_P126" (solid, pour order 126): 89.426,114.107 93.483,110.05 93.875,110.05 93.875,114.05
GND on Top Layer "GND_L01_P122" (solid, pour order 122): 89.45,99.472 89.478,99.5 93.95,99.5 93.95,110.2 93.875,110.275 93.875,110.05 89.425,114.5
GND on Top Layer "GND_L01_P120" (solid, pour order 120): 93.55,86.875 95.25,88.575 101.9,88.575 101.9,88.525 103.425,87
GND on Top Layer "GND_L01_P118" (solid, pour order 118): 94.025,88.3 99.15,88.3 99.175,88.325 98.9,88.6 98.9,100.175 93.375,100.175 92.95,99.75
GND on Top Layer "GND_L01_P116" (solid, pour order 116): 89.45,88.25 89.45,93.825 89.525,93.9 95.25,88.175 99.225,88.175
GND on Top Layer "GND_L01_P114" (solid, pour order 114): 98.6,88.3 89.5,88.3 98.5,97.3 98.5,99.7 89.625,99.7 89.6,99.725 89.45,99.575 89.45,88.25
GND on Top Layer "GND_L01_P112" (solid, pour order 112): 89.45,75.775 89.575,75.65 101.475,75.65 101.475,88.45 101.325,88.6 100.975,88.25 89.45,88.25
GND on Top Layer "GND_L01_P106" (solid, pour order 106): 123.05,144.675 123.05,124.325 122.925,124.2 122.825,124.3 111.1,124.3 111.1,144.725 111.275,144.9
GND on Top Layer "GND_L01_P060" (solid, pour order 60): 124.746,128.552 124.746,128.321 122.1,125.675 121,126.775 121,130.075
GND on Top Layer "GND_L01_P092" (solid, pour order 92): 101.625,115.85 109.25,115.85 109.275,115.875 110.425,114.725 110.425,111.025 101.8,111.025 101.6,110.825
GND on Top Layer "GND_L01_P090" (solid, pour order 90): 111.642,90.825 110.025,90.825 106.675,87.475 106.675,83.825
GND on Top Layer "GND_L01_P084" (solid, pour order 84): 101.475,75.65 109.757,75.65 109.95,75.843 109.95,88.6 101.525,88.6 101.25,88.325
GND on Top Layer "GND_L01_P098" (solid, pour order 98): 127.775,90.85 127.775,95.85 127.8,95.875 127.825,95.85 133,95.85 133,91.2 133.35,90.85
GND on Top Layer "GND_L01_P086" (solid, pour order 86): 110.8,90.85 110.825,90.825 110.825,88.65
GND on Top Layer "GND_L01_P020" (solid, pour order 20): 128.675,90.85 128.725,90.9 136.075,90.9 136.075,84.95 133.625,82.5
GND on Top Layer "GND_L01_P016" (solid, pour order 16): 109.525,75.75 109.575,75.7 134.5,75.7 134.5,85.85 129.525,90.825 110.025,90.825
no net on Top Layer "NONET_L01_P104" (solid, pour order 104): 145.225,106.1 145.319,106.194 147.875,106.194 147.875,103.45 147.55,103.125 145.275,103.125
no net on Top Layer "NONET_L01_P102" (solid, pour order 102): 147.435,112.493 150.757,112.493 150.825,112.425 150.825,103.75 147.375,103.75
no net on Top Layer "NONET_L01_P100" (solid, pour order 100): 146.631,110.879 146.66,110.85 150,110.85 150,105.55 149.85,105.7 146.65,105.7
GND on Top Layer "GND_L01_P058" (solid, pour order 58): 141.45,116.8 141.6,116.95 145.525,116.95 145.525,112.075 145.375,111.925 144.725,112.575 139.9,112.575
GND on Top Layer "GND_L01_P056" (solid, pour order 56): 134.8,117.075 134.75,117.025 134.75,112.55 140.23,112.55 144.537,116.857
GND on Top Layer "GND_L01_P054" (solid, pour order 54): 144.475,121.2 130.375,121.2 130.55,121.025 130.55,116.825 144.725,116.825
GND on Top Layer "GND_L01_P034" (solid, pour order 34): 141.5,129.95 141.5,136.55 141.575,136.475 146.55,136.475 146.55,130.225 146.325,130
GND on Top Layer "GND_L01_P032" (solid, pour order 32): 146.65,125.075 146.625,125.1 140.475,125.1 140.475,130.05 140.5,130.025 146.625,130.025
GND on Top Layer "GND_L01_P030" (solid, pour order 30): 144.75,146.2 150.85,146.2 150.9,146.15 150.75,146 150.75,111.65 145.8,111.65 144.375,113.075
GND on Top Layer "GND_L01_P028" (solid, pour order 28): 144.35,146.125 150.725,146.125 150.775,146.075 144.575,139.875 144.575,115.455 150.745,115.455 149.9,116.3 149.9,146.15
GND on Top Layer "GND_L01_P004" (solid, pour order 4): 123,145.175 123,139.825 123.125,139.7 150.85,139.7 150.85,144.8 150.75,144.9
GND on Top Layer "GND_L01_P018" (solid, pour order 18): 134.5,75.7 134.5,103.2 135.35,104.05 135.65,103.75 150.825,103.75 150.825,76.4 150.525,76.1
GND on Top Layer "GND_L01_P036" (solid, pour order 36): 137.75,137.025 137.775,137 137.775,133.15 132.05,133.15 132.125,133.225 132.125,136.95
GND on Top Layer "GND_L01_P038" (solid, pour order 38): 134.147,133.579 134.147,130.072 133.925,129.85 130.25,129.85 130.25,133.525 130.35,133.625
GND on Top Layer "GND_L01_P040" (solid, pour order 40): 123,139.975 123.15,139.825 132.494,139.825 132.494,133.948 131.971,133.425 122.8,133.425
GND on Top Layer "GND_L01_P042" (solid, pour order 42): 122.816,133.948 122.816,128.559 123.45,127.925 131.15,127.925 131.15,133.8
no net on Top Layer "NONET_L01_P074" (solid, pour order 74): 94.475,112.475 94.525,112.525 105.65,112.525 105.65,99.35 105.4,99.6 94.425,99.6
GND on Top Layer "GND_L01_P096" (solid, pour order 96): 110.425,111.025 105.975,111.025 105.975,107.875 107.775,106.075 110.475,106.075

## Keep-outs
Keep-Out Layer:
  lines w0.3: 52.1,77.5 149.5,77.5 149.5,144.9 52.1,144.9 52.1,77.5

## Other copper
Top Layer:
  rectangle net GND: 145.2,103.75 148.8,104.55
  rectangle net GND: 144.523,112.587 148.3,112.925
  rectangle net GND: 150,104.65 150.625,112.275
  rectangle net GND: 147.25,112.35 150.75,113.375
  rectangle net GND: 147.3,112.3 150.75,112.35
  rectangle net GND: 147.6,103.725 150.825,104.666
  rectangle net GND: 148.725,103.875 150.25,104
  rectangle net GND: 149.013,112.879 150.475,112.9
  rectangle net GND: 117.2,101.225 121.925,106.075
  rectangle net GND: 148.675,141.354 149.35,143.575
  rectangle net GND: 122.731,134.25 124,143.219
  text "STM_BOARD_V02" at 96.125,138.825 h1.52
  text "J1" at 145.425,135.2 h1.52 r270
  text "StarrLucky" at 96.125,133.975 h1.52
  text "UART" at 121.05,119.875 h1.52 r359.8
  text "JTAG" at 134.85,117.725 h1.52
  text "GPIO" at 143.175,100.325 h1.52 r270
  text "Reset" at 92.85,96.5 h1.52 r270
  text "SPI/GPIO/I2C" at 111.375,82.275 h1.52

## Silkscreen, mask and mechanical layers (free items; w line width, h text height)
Drill Drawing:
  text ".LEGEND" at 155.88,81.28 h1.52
  text "Drill Drawing." at 155.88,78.74 h1.52

## Text inside footprints (layer, text, board x,y; h text height)
P6: Top Overlay "3" at 127.526,118.648 h1.27 r180; Top Overlay "4" at 127.526,116.108 h1.27 r180; Top Overlay "2" at 134.13,116.108 h1.27 r180; Top Overlay "1" at 133.622,118.648 h1.27 r180
P7: Top Overlay "10" at 139.792,90.966 h1.27 r270; Top Overlay "9" at 137.252,90.966 h1.27 r270; Top Overlay "1" at 137.252,104.682 h1.27 r270; Top Overlay "2" at 139.792,105.19 h1.27 r270
P9: Top Overlay "3" at 120.436,118.683 h1.27 r180; Top Overlay "4" at 120.436,116.143 h1.27 r180; Top Overlay "2" at 127.04,116.143 h1.27 r180; Top Overlay "1" at 126.532,118.683 h1.27 r180
P11: Top Overlay "10" at 125.979,88.592 h1.27; Top Overlay "9" at 125.979,86.052 h1.27; Top Overlay "1" at 112.263,86.052 h1.27; Top Overlay "2" at 111.755,88.592 h1.27